# Altium PCB PCB.PCBDOC (part 1 of 3)
Units mil, origin at the board's own origin, x right, y up, seen from the top; angles counter-clockwise.
Board outline 2850 x 2710 mil, 2 copper layers (Top Layer, Bottom Layer); 25 components, 0 nets, 106 pads, 0 vias.
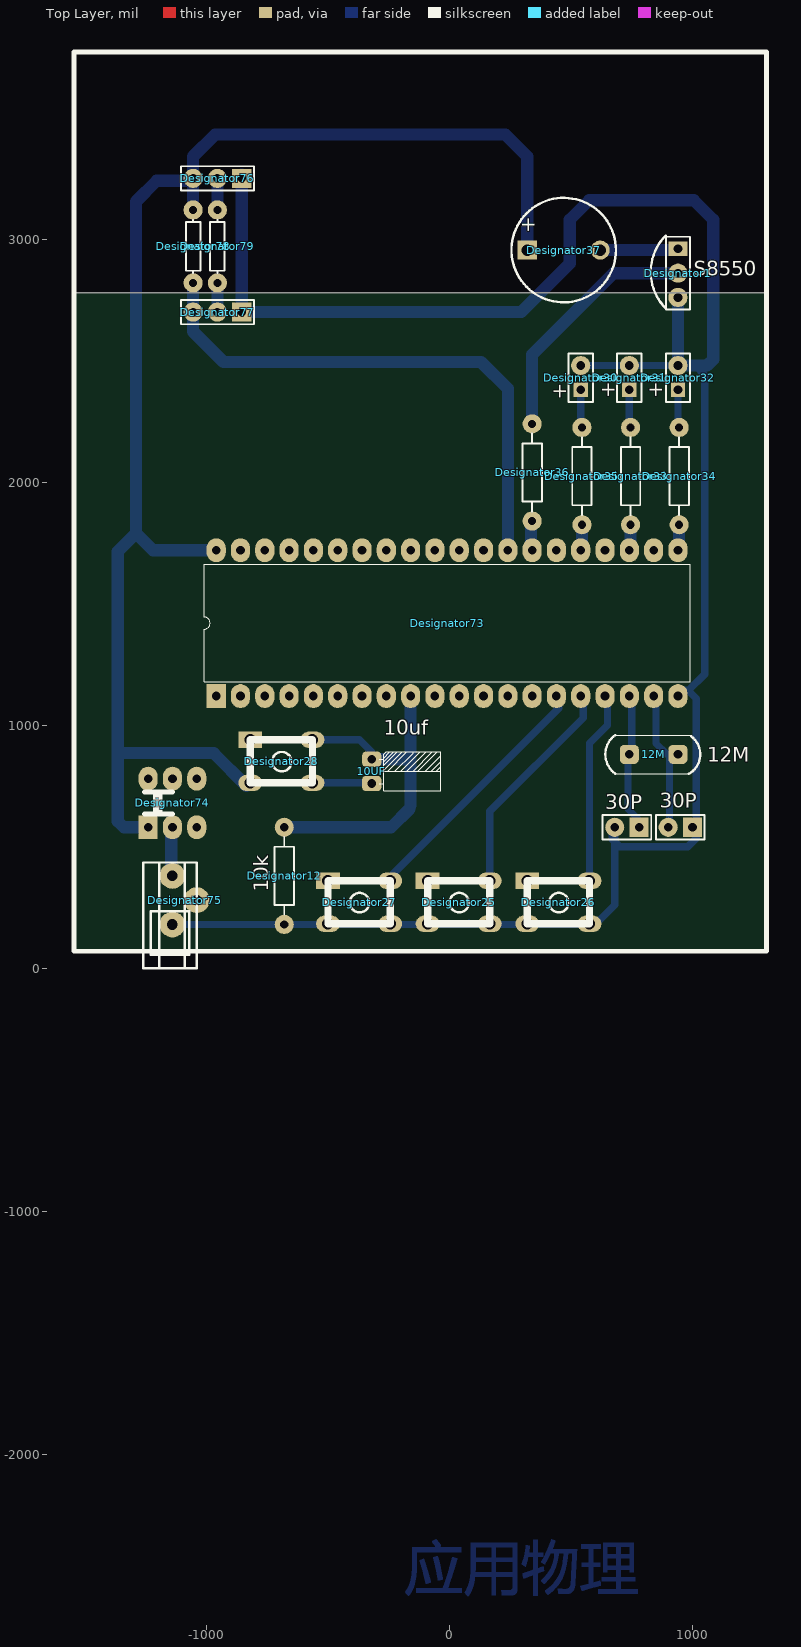
[diagram p0: Top Layer view]
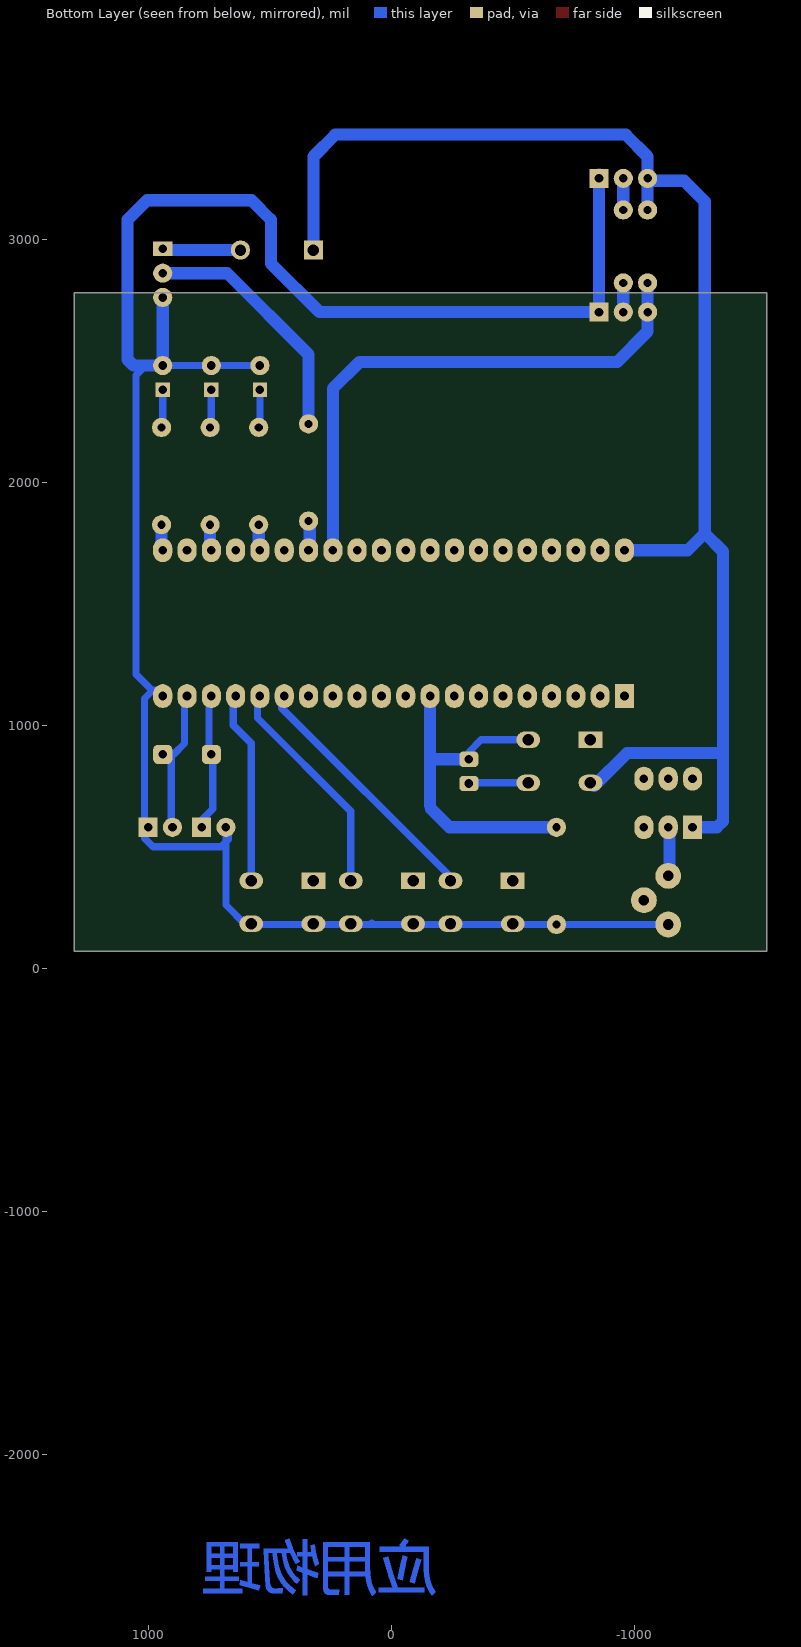
[diagram p1: Bottom Layer view, seen from below]

## Layer stack, top to bottom
Top Layer: signal copper 1.4
Dielectric: dielectric 12.6, FR-4, Dk 4.8
Bottom Layer: signal copper 1.4

## Board outline
-1545,70 -1545,2780 1305,2780 1305,70

## Design rules (kind name [scope] priority, off if disabled: settings)
Clearance [All] p1: gap=10
ComponentClearance [All] p1: gap=10 collisioncheckmode=3 verticalgap=10
PolygonConnect [All] p1: connectstyle=Relief reliefconductorwidth=10 reliefentries=4 polygonreliefangle="90 Angle"
RoutingVias [All] p1: holewidth=28 width=50 viastyle="Through Hole" minholewidth=28 minwidth=50 maxholewidth=28 maxwidth=50
SolderMaskExpansion [All] p1: expansion=4
TestPointUsage [All] p1: valid=0 allowmultiple=FALSE
Testpoint [All] p1: side=3 testpointundercomponent=TRUE minsize=40 maxsize=100 preferedsize=60 minholesize=0 maxholesize=40 preferedholesize=32 testpointgrid=1 style=297 order=0123456789
Width [All] p1: maxlimit=10 minlimit=10 preferedwidth=10
18 further rules are at their usual default settings.

## Components (designator, comment, footprint, x,y, rotation, side; value= is the part's Value field where it differs from the comment)
10UF "Comment" 10UF -320,860 r0 top
12M "Comment" XTAL 740,880 r0 top
30P "Comment" HDR1X2#1 780,580 r180 top
30P "Comment" HDR1X2#1 1000,580 r180 top
Designator1 "Comment" HDR1X3#1 940,2960 r270 top
Designator12 "Comment" AXIAL-0.4 -680,380 r90 top
Designator25 "Comment" pw -90,360 r0 top
Designator26 "Comment" pw 320,360 r0 top
Designator27 "Comment" pw -500,360 r0 top
Designator28 "Comment" pw -820,940 r0 top
Designator30 "Comment" HDR1X2#2 540,2380 r90 top
Designator31 "Comment" HDR1X2#2 740,2380 r90 top
Designator32 "Comment" HDR1X2#2 940,2380 r90 top
Designator33 "Comment" AXIAL-0.4 745,2025 r90 top
Designator34 "Comment" AXIAL-0.4 945,2025 r90 top
Designator35 "Comment" AXIAL-0.4 545,2025 r90 top
Designator36 "Comment" AXIAL-0.4 340,2040 r90 top
Designator37 "Comment" HDR1X4 320,2955 r0 top
Designator73 "Comment" STC89C52 -960,1120 r90 top
Designator74 "Comment" SWITCH -1240,580 r90 top
Designator75 "Comment" power -1140,180 r90 top
Designator76 "Comment" HDR1X3#2 -855,3250 r180 top
Designator77 "Comment" HDR1X3#2 -855,2700 r180 top
Designator78 "Comment" AXIAL-0.3 -1055,2970 r90 top
Designator79 "Comment" AXIAL-0.3 -955,2970 r90 top

## Footprints (in the part's own frame and the unit in brackets; to place one, negate y for a bottom-side part, rotate by r counter-clockwise, add the part's x,y. Pads: shape width x height; smd on the part's side, far side on the other; paste and mask are expansions set on the pad)
10UF [mm]
  rrect50% 2x1.6 hole 0.9: 1(0,-2.54) 2(0,0)
  silkscreen extent 0.76,-3.3 7.24,0.76
AXIAL-0.3 [mm] "Resistor; 2 Leads"
  round 2 hole 0.85: 1(-3.81,0) 2(3.81,0)
  silkscreen extent -2.77,-0.76 2.77,0.76
AXIAL-0.4 [mm] "Resistor; 2 Leads"
  round 2 hole 0.85: 1(-5.08,0) 2(5.08,0)
  silkscreen extent -4.06,-1.02 4.06,1.02
HDR1X2#1 [mm] "Connector; Header; 2 Position"
  rect 2x2 hole 0.9: 1(0,0)
  round 2 hole 0.9: 2(2.54,0)
  silkscreen extent -1.27,-1.27 3.81,1.27
HDR1X2#2 [mm] "Connector; Header; 2 Position"
  rect 1.5x1.5 hole 0.9: 1(0,0)
  round 2 hole 0.9: 2(2.54,0)
  silkscreen extent -1.27,-1.27 3.81,1.27
HDR1X3#1 [mm] "Connector; Header; 3 Position"
  rect 1.5x2 hole 0.9: 1(0,0)
  round 2 hole 0.9: 2(2.54,0) 3(5.08,0)
  silkscreen extent -1.27,-1.27 6.35,1.27
HDR1X3#2 [mm] "Connector; Header; 3 Position"
  rect 2x2 hole 0.9: 1(0,0)
  round 2 hole 0.9: 2(2.54,0) 3(5.08,0)
  silkscreen extent -1.27,-1.27 6.35,1.27
HDR1X4 [mm] "Connector; Header; 4 Position"
  rect 2x2 hole 1.2: 1(0,0)
  round 0 all layers, no hole: 2(2.54,0) 3(5.08,0)
  round 2 hole 1.2: 4(7.62,0)
power [mm]
  round 2.7 hole 1.1: 1(5.08,0) 2(0,0) 3(2.54,-2.54)
  silkscreen extent -4.57,-2.54 6.48,3.05
pw [mm]
  rect 2.5x1.7 hole 1.2: 1(0,0)
  oval 2.5x1.7 hole 1.2: 2(0,-4.5) 3(6.5,-4.5) 4(6.5,0)
  silkscreen extent 0,-4.5 6.5,0
STC89C52 [mm]
  rect 2.5x2 hole 0.9: 1(0,0)
  oval 2.5x2 hole 0.9: 2(0,-2.54) 3(0,-5.08) 4(0,-7.62) 5(0,-10.16) 6(0,-12.7) 7(0,-15.24) 8(0,-17.78) 9(0,-20.32) 10(0,-22.86) 11(0,-25.4) 12(0,-27.94) 13(0,-30.48) 14(0,-33.02) 15(0,-35.56) 16(0,-38.1) 17(0,-40.64) 18(0,-43.18) 19(0,-45.72) 20(0,-48.26) 21(15.24,-48.26) 22(15.24,-45.72) 23(15.24,-43.18) 24(15.24,-40.64) 25(15.24,-38.1) 26(15.24,-35.56) 27(15.24,-33.02) 28(15.24,-30.48) 29(15.24,-27.94) 30(15.24,-25.4) 31(15.24,-22.86) 32(15.24,-20.32) 33(15.24,-17.78) 34(15.24,-15.24) 35(15.24,-12.7) 36(15.24,-10.16) 37(15.24,-7.62) 38(15.24,-5.08) 39(15.24,-2.54) 40(15.24,0)
  silkscreen extent 1.48,-49.53 13.76,1.27
SWITCH [mm]
  oval 2.5x2 hole 0.9: 1(0,-5.08) 2(5.08,-5.08) 3(0,-2.54) 4(5.08,-2.54) 6(5.08,0)
  rect 2.5x2 hole 0.9: 5(0,0)
  silkscreen extent 1.4,-2.54 3.68,0.38
XTAL [mm]
  rrect50% 2x2 hole 0.9: 1(0,0) 2(5.08,0)
  silkscreen extent -2.5,-2.03 7.41,2.02

## Nets (pads, with @x,y where several pads share a name; then routed paths per layer and width w, separated by ;. In a path a pad name is that pad's centre, name@x,y a point inside that pad or via, vN(x,y) a via of type N, cw(c..) or ccw(c..) an arc to the next point about the centre after c; other vN are vias at no path point)
pads on no net: 10UF.1 10UF.2 12M.1 12M.2 30P.1 30P.2 Designator1.1 Designator1.2 Designator1.3 Designator12.1 Designator12.2 Designator25.1 Designator25.2 Designator25.3 Designator25.4 Designator26.1 Designator26.2 Designator26.3 Designator26.4 Designator27.1 Designator27.2 Designator27.3 Designator27.4 Designator28.1 Designator28.2 Designator28.3 Designator28.4 Designator30.1 Designator30.2 Designator31.1 Designator31.2 Designator32.1 Designator32.2 Designator33.1 Designator33.2 Designator34.1 Designator34.2 Designator35.1 Designator35.2 Designator36.1 Designator36.2 Designator37.1 Designator37.2 Designator37.3 Designator37.4 Designator73.1 Designator73.2 Designator73.3 Designator73.4 Designator73.5 Designator73.6 Designator73.7 Designator73.8 Designator73.9 Designator73.10 Designator73.11 Designator73.12 Designator73.13 Designator73.14 Designator73.15 Designator73.16 Designator73.17 Designator73.18 Designator73.19 Designator73.20 Designator73.21 Designator73.22 Designator73.23 Designator73.24 Designator73.25 Designator73.26 Designator73.27 Designator73.28 Designator73.29 Designator73.30 Designator73.31 Designator73.32 Designator73.33 Designator73.34 Designator73.35 Designator73.36 Designator73.37 Designator73.38 Designator73.39 Designator73.40 Designator74.1 Designator74.2 Designator74.3 Designator74.4 Designator74.5 Designator74.6 Designator75.1 Designator75.2 Designator75.3 Designator76.1 Designator76.2 Designator76.3 Designator77.1 Designator77.2 Designator77.3 Designator78.1 Designator78.2 Designator79.1 Designator79.2
copper on no net: | length 105332.1